# Altium PCB TLS-01.PcbDoc
Units mm, origin at the board's own origin, x right, y up, seen from the top; angles counter-clockwise.
Board outline 25.98 x 36.5 mm, 2 copper layers (Top Layer, Bottom Layer); 9 components, 25 nets, 58 pads, 19 vias.
Unrouted connection lines stored in the file: 2.
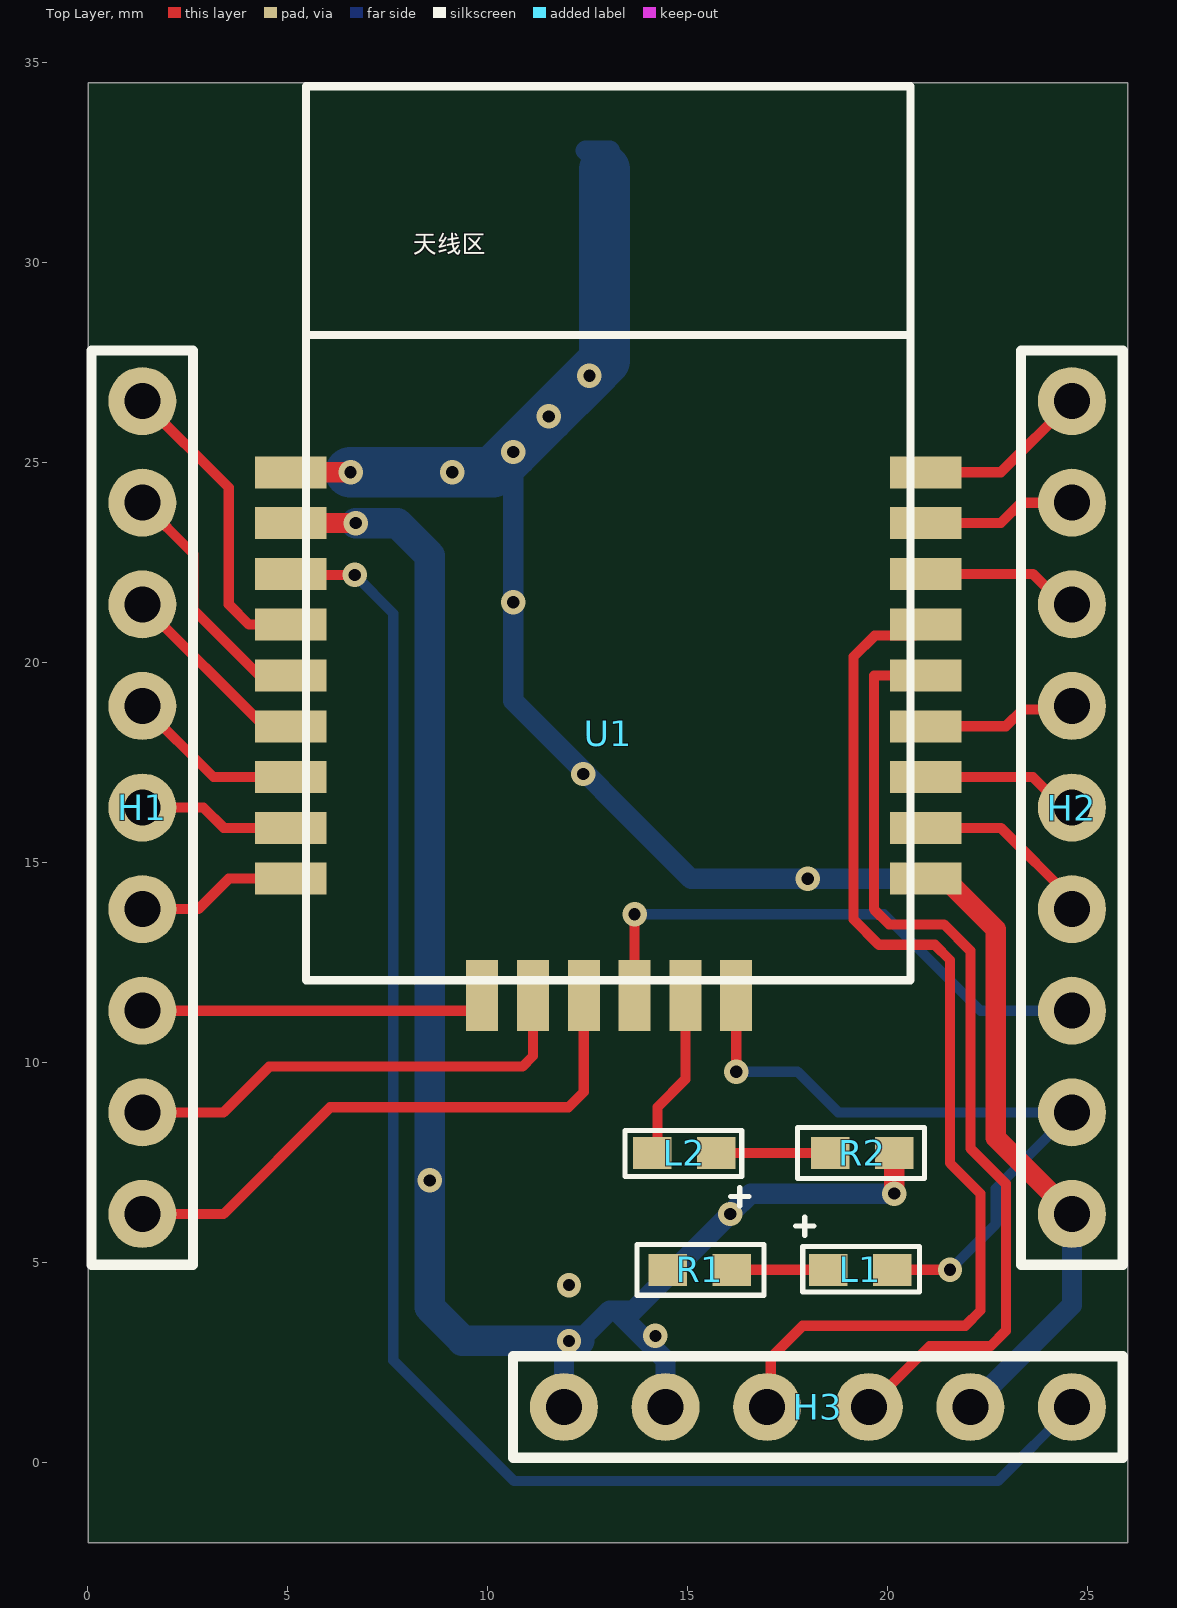
[diagram p0: Top Layer view]
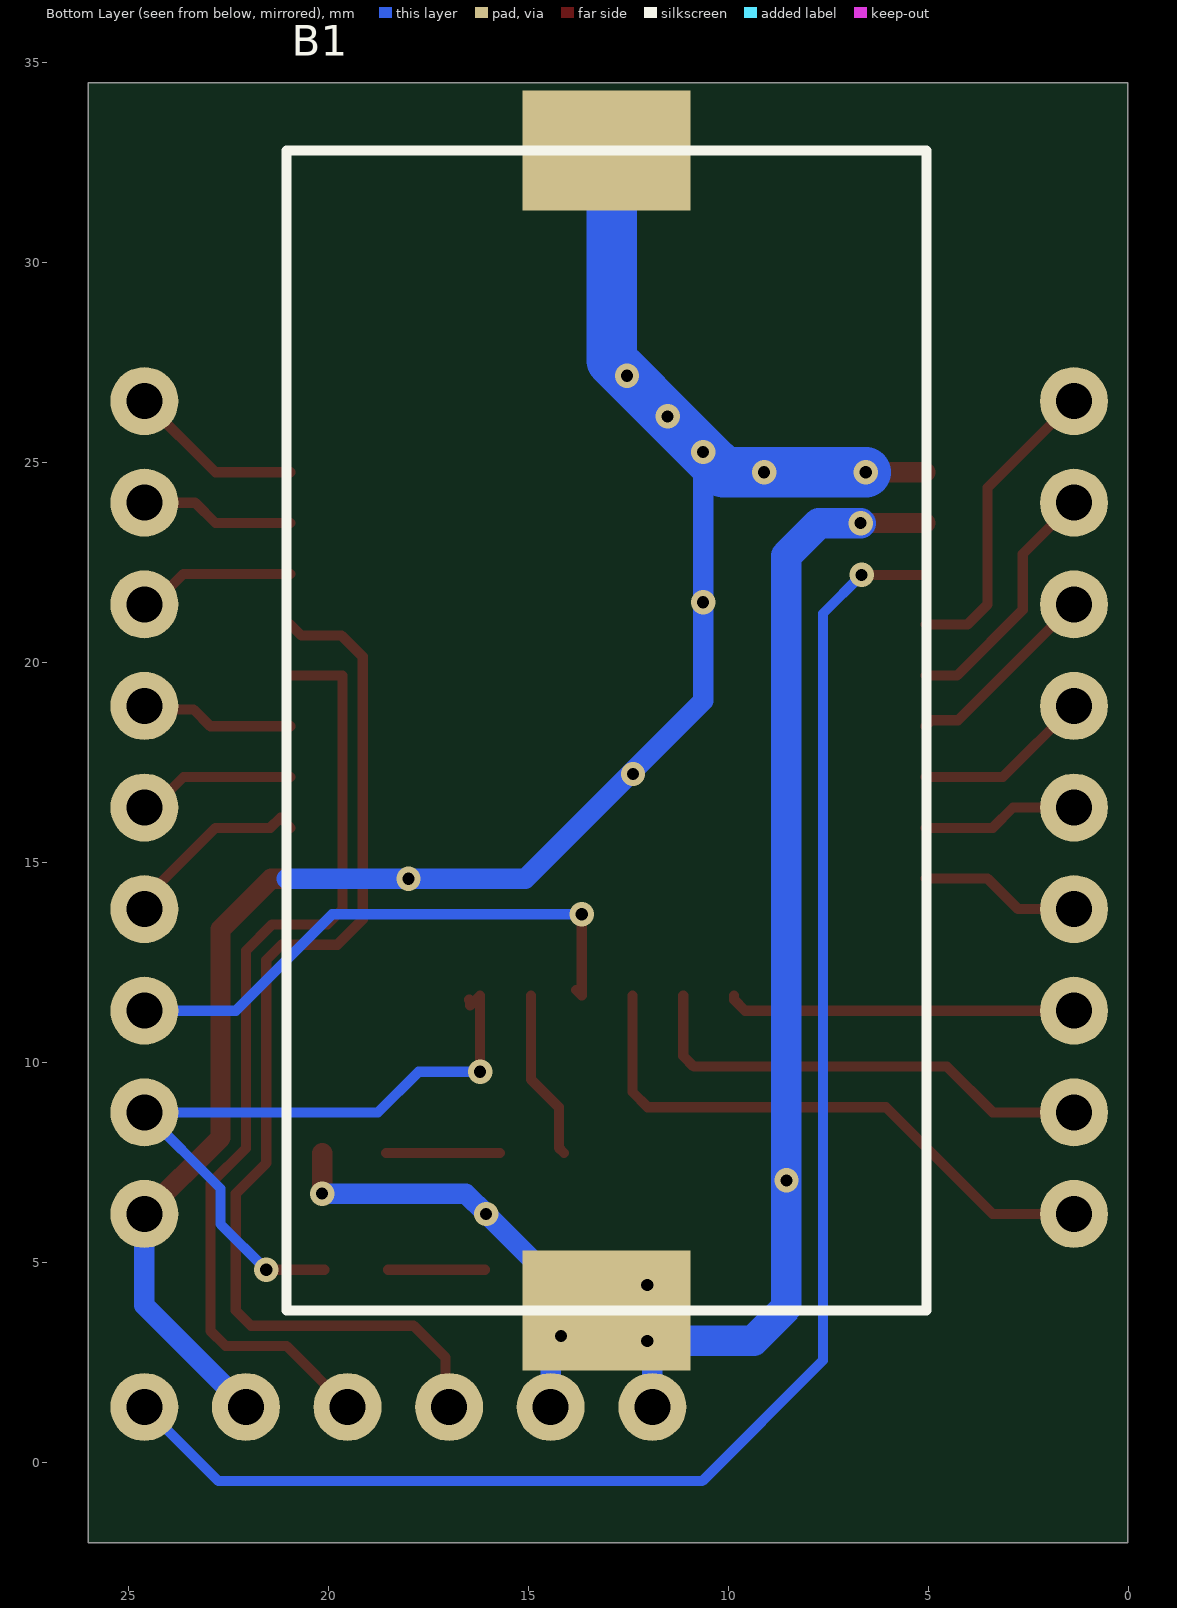
[diagram p1: Bottom Layer view, seen from below]

## Layer stack, top to bottom
Top Solder: solder mask 0.0102, Solder Resist, Dk 3.5
Top Layer: signal copper 0.0356
Dielectric 1: dielectric 0.32, FR-4, Dk 4.8
Bottom Layer: signal copper 0.0356
Bottom Solder: solder mask 0.0102, Solder Resist, Dk 3.5

## Board outline
0.025,-2 0.025,34.5 26.01,34.5 26.01,-2

## Design rules (kind name [scope] priority, off if disabled: settings)
Clearance [All] p1: gap=0.254 ignorepadtopadclearanceinfootprint=FALSE except(0: Arc-Hole Track-Hole SMDPad-Hole THPad-Hole Via-Hole Fill-Hole Poly-Hole Region-Hole Text-Hole)
PolygonConnect [All] p1: connectstyle=Relief reliefconductorwidth=0.254 reliefentries=4 polygonreliefangle="90 Angle" airgapwidth=0.254
RoutingVias [All] p1: holewidth=0.711 width=1.27 viastyle="Through Hole" minholewidth=0.711 minwidth=1.27 maxholewidth=0.711 maxwidth=1.27
SolderMaskExpansion [All] p1: expansion=0.102
Width power [InNetClass('power')] p1: maxlimit=2.54 minlimit=0.254 preferedwidth=0.508
Width Width_1 [All] p2: maxlimit=1.524 minlimit=0.254 preferedwidth=0.254
30 further rules are at their usual default settings.

## Classes and differential pairs
net class power: GND VCC

## Components (designator, comment, footprint, x,y, rotation, side; value= is the part's Value field where it differs from the comment)
B1 "BATTERY" PCBComponent_1 13.056,3.81 r0 bottom
H1 "H_L" L 1.372,26.543 r0 top
H2 "H_R" R 24.613,26.543 r0 top
H3 "Header_6" D 11.913,1.397 r0 top
L1 "LED0603" LED0603 18.517,4.826 r0 top
L2 "LED0603" LED0603 15.723,7.747 r180 top
R1 "Res330" Res0603 14.504,4.826 r0 top
R2 "Res330" Res0603 20.168,7.747 r180 top
U1 "TLS-01" TLS-01 5.45,12.078 r0 top

## Footprints (in the part's own frame and the unit in brackets; to place one, negate y for a bottom-side part, rotate by r counter-clockwise, add the part's x,y. Pads: shape width x height; smd on the part's side, far side on the other; paste and mask are expansions set on the pad)
D [mm]
  round 1.7 hole 0.9: 10(0,0) 11(2.54,0) 12(5.08,0) 13(7.62,0) 14(10.16,0) 15(12.7,0)
  silkscreen extent -1.27,-1.27 13.97,1.27
L [mm]
  round 1.7 hole 0.9: 1(0,0) 2(0,-2.54) 3(0,-5.08) 4(0,-7.62) 5(0,-10.16) 6(0,-12.7) 7(0,-15.24) 8(0,-17.78) 9(0,-20.32)
  silkscreen extent -1.27,-21.59 1.27,1.27
LED0603 [mm]
  rect 0.965x0.8 smd: 1(0,0) 2(1.6,0)
  silkscreen extent -0.81,-0.56 2.29,1.32
PCBComponent_1 [mm]
  rect 4.2x3 smd: 1(0,0) 2(0,-29)
  silkscreen extent -8,-29 8,0
R [mm]
  round 1.7 hole 0.9: 16(0,-20.32) 17(0,-17.78) 18(0,-15.24) 19(0,-12.7) 20(0,-10.16) 21(0,-7.62) 22(0,-5.08) 23(0,-2.54) 24(0,0)
  silkscreen extent -1.27,-21.59 1.27,1.27
Res0603 [mm]
  rect 0.965x0.8 smd: 1(0,0) 2(1.6,0)
  silkscreen extent -0.76,-0.64 2.41,0.64
TLS-01 [mil]
  rect 70x31.5 smd: 1(-14.5,499.5) 2(-14.5,449.5) 3(-14.5,399.5) 4(-14.5,349.5) 5(-14.5,299.5) 6(-14.5,249.5) 7(-14.5,199.5) 8(-14.5,149.5) 9(-14.5,99.5) 16(610.5,99.5) 17(610.5,149.5) 18(610.5,199.5) 19(610.5,249.5) 20(610.5,299.5) 21(610.5,349.5) 22(610.5,399.5) 23(610.5,449.5) 24(610.5,499.5)
  rect 31.5x70 smd: 10(173.96,-15.5) 11(223.96,-15.5) 12(273.96,-15.5) 13(323.96,-15.5) 14(373.96,-15.5) 15(423.96,-15.5)
  silkscreen extent 0,0 596,879

## Part data
H3: library part Header_L
R1 R2: library part Res0603

## Via types
v1: diameter 0.61, hole 0.305, Top Layer to Bottom Layer, 19 vias

## Nets (pads, with @x,y where several pads share a name; then routed paths per layer and width w, separated by ;. In a path a pad name is that pad's centre, name@x,y a point inside that pad or via, vN(x,y) a via of type N, cw(c..) or ccw(c..) an arc to the next point about the centre after c; other vN are vias at no path point)
GND: B1.2 H2.16 H3.14 U1.1 U1.16 | length 49.6
  Top Layer w0.508: U1.1 v1(6.579,24.765) ; U1.16 21.446,14.605 22.708,13.343 22.708,8.128 H2.16
  Bottom Layer w0.508: v1(10.643,25.273) 10.643,19.05 15.088,14.605 v1(18.009,14.605) 21.057,14.605 ; B1.2@12.929,32.337 12.456,32.81 B1.2 ; H3.14 24.613,3.937 H2.16
  Bottom Layer w1.27: v1(6.579,24.765) v1(9.119,24.765) 10.135,24.765 v1(10.643,25.273) v1(11.532,26.162) v1(12.548,27.178) 12.929,27.559 B1.2@12.929,32.337
  other v1: 12.395,17.221 10.643,21.514
PA1: H1.7 U1.10 | length 8.7
  Top Layer w0.254: H1.7 9.596,11.303 9.869,11.576 U1.10
PA5: H1.8 U1.11 | length 11.9
  Top Layer w0.254: H1.8 3.404,8.763 4.547,9.906 10.875,9.906 11.139,10.17 U1.11
PB0: H1.9 U1.12 | length 14.7
  Top Layer w0.254: H1.9 3.404,6.223 6.071,8.89 12.028,8.89 12.409,9.271 U1.12
PB5: H2.18 U1.13 | length 14.2
  Top Layer w0.254: v1(13.679,13.716) U1.13 U1.13@13.818,11.823
  Bottom Layer w0.254: v1(13.679,13.716) 19.914,13.716 22.327,11.303 H2.18
PB6: L2.2 U1.14 | length 4.3
  Top Layer w0.254: L2.2 14.25,7.874 14.25,8.89 14.949,9.589 U1.14
PC0: H2.17 L1.2 U1.15 | length 17.9
  Top Layer w0.254: v1(16.219,9.779) U1.15 16.473,11.43 16.473,11.557 U1.15@16.492,11.576 ; L1.2 v1(21.565,4.826)
  Bottom Layer w0.254: v1(16.219,9.779) 17.755,9.779 18.771,8.763 H2.17 22.708,6.858 22.708,5.969 v1(21.565,4.826)
PC1: H2.19 U1.17 | length 4.9
  Top Layer w0.254: U1.17 21.211,16.129 21.465,15.875 22.835,15.875 24.613,14.097 H2.19
PC2: H2.20 U1.18 | length 4
  Top Layer w0.254: U1.18 23.634,17.145 24.396,16.383 H2.20
PC4: H2.21 U1.19 | length 3.9
  Top Layer w0.254: U1.19 22.962,18.415 23.382,18.835 24.525,18.835 H2.21
PD4: H2.22 U1.22 | length 4.3
  Top Layer w0.254: U1.22 23.634,22.225 24.396,21.463 H2.22 H2.22@24.398,21.678
PD5: H2.23 U1.23 | length 4.6
  Top Layer w0.254: U1.23 22.835,23.495 23.343,24.003 H2.23 H2.23@24.105,23.495
PE4: H1.1 U1.4 | length 7.7
  Top Layer w0.254: H1.1 3.531,24.384 3.531,21.463 4.039,20.955 U1.4
PE5: H1.2 U1.5 | length 6.3
  Top Layer w0.254: H1.2 2.653,22.722 2.653,21.325 4.293,19.685 U1.5
PE6: H1.3 U1.6 | length 5.1
  Top Layer w0.254: H1.3 1.372,21.248 1.587,21.248 4.271,18.564 4.933,18.564 U1.6
PE7: H1.4 U1.7 | length 4.4
  Top Layer w0.254: H1.4 3.15,17.145 U1.7
PF0: H1.5 U1.8 | length 3.9
  Top Layer w0.254: H1.5 2.896,16.383 3.404,15.875 U1.8
PF1: H1.6 U1.9 | length 4
  Top Layer w0.254: H1.6 2.769,13.843 3.531,14.605 U1.9
R_LOW1: L1.1 R1.2 | length 2.4
  Top Layer w0.254: R1.2 L1.1
R_LOW2: L2.1 R2.2 | length 2.8
  Top Layer w0.254: L2.1 R2.2
RST: H2.24 U1.24 | length 4.4
  Top Layer w0.254: U1.24 22.835,24.765 H2.24
RX: H3.12 U1.21 | length 27.6
  Top Layer w0.254: H3.12 17.081,1.485 17.081,2.628 17.882,3.429 21.946,3.429 22.327,3.81 22.327,6.731 21.565,7.493 21.565,12.573 21.184,12.954 19.787,12.954 19.152,13.589 19.152,20.152 19.681,20.682 20.684,20.682 U1.21
SWS: H3.15 U1.3 | length 40.6
  Top Layer w0.254: U1.3 5.107,22.2 v1(6.68,22.2)
  Bottom Layer w0.254: v1(6.68,22.2) 7.645,21.234 7.645,2.565 10.668,-0.457 22.758,-0.457 H3.15
TX: H3.13 U1.20 | length 24.1
  Top Layer w0.254: H3.13 21.057,2.921 22.581,2.921 22.962,3.302 22.962,6.976 22.073,7.865 22.073,12.805 21.416,13.462 20.041,13.462 19.66,13.843 19.66,19.685 U1.20
VCC: B1.1 H3.10 H3.11 R1.1 R2.1 U1.2 | length 41.9
  Top Layer w0.508: U1.2 v1(6.706,23.495) ; v1(20.168,6.731) R2.1
  Bottom Layer w0.508: H3.10 11.913,2.667 12.294,3.048 B1.1 B1.1@13.207,3.81 ; H3.11 14.453,2.564 B1.1@13.207,3.81 ; v1(20.168,6.731) 16.577,6.731 v1(16.069,6.223) 13.656,3.81 B1.1@13.207,3.81
  Bottom Layer w0.762: v1(6.706,23.495) 7.747,23.495 8.56,22.682 v1(8.56,7.061) 8.56,3.886 9.373,3.073 9.373,3.048 v1(12.04,3.048) B1.1@12.294,3.048
  other v1: 14.199,3.175 12.04,4.445

## Polygon pours and split planes (outlines as drawn)
no net on Mechanical 1 (solid): 11.532,19.895

## Silkscreen, mask and mechanical layers (free items; w line width, h text height)
Mechanical 1:
  the board outline again, w0.127

## Text inside footprints (layer, text, board x,y; h text height)
U1: Top Overlay "天线区" at 8.13,30.099 h0.76